# Altium PCB HammerHeadBreakout.PcbDoc
Units mil, origin at the board's own origin, x right, y up, seen from the top; angles counter-clockwise.
Board outline 4000 x 1500 mil, 2 copper layers (Top Layer, Bottom Layer); 23 components, 20 nets, 85 pads, 24 vias.
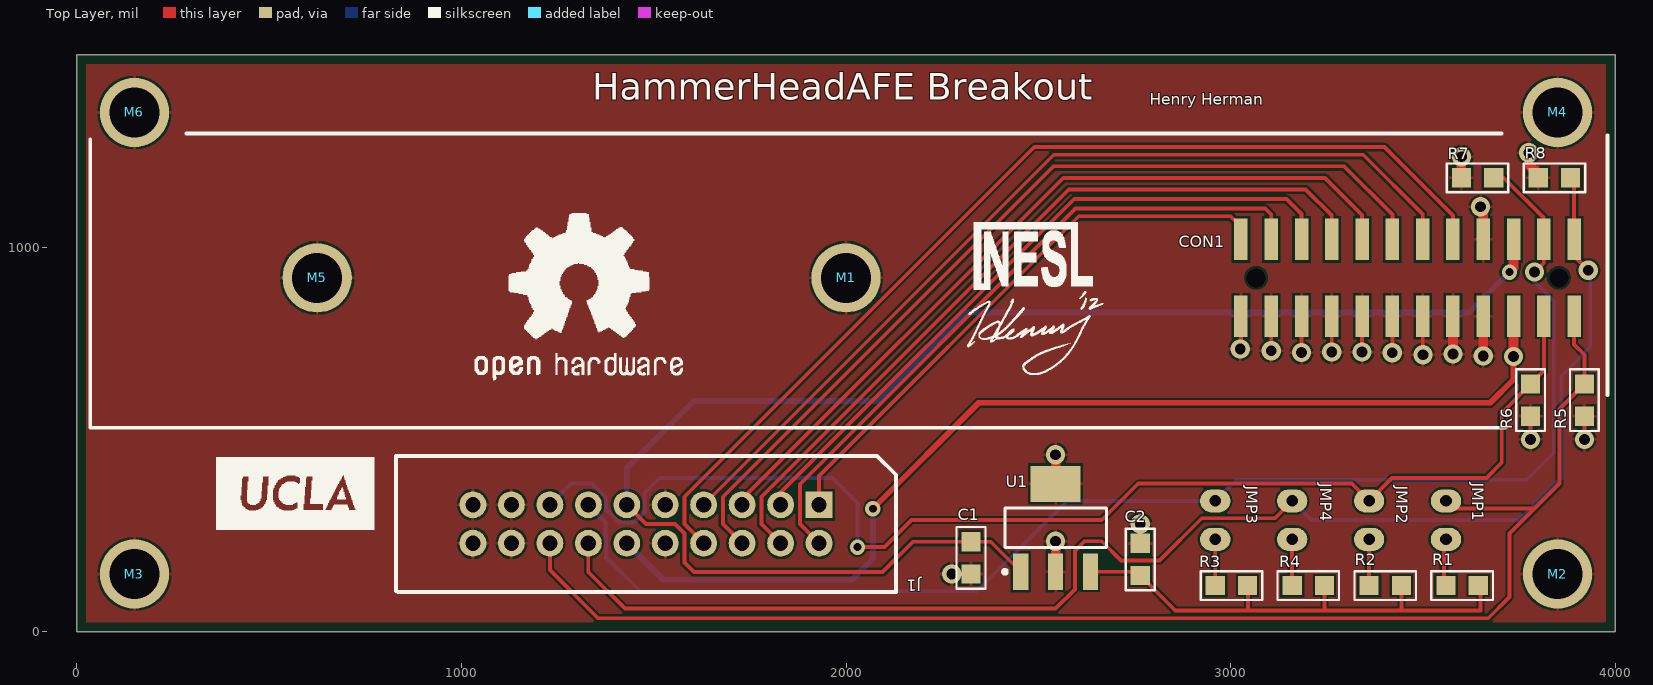
[diagram p0: Top Layer view]
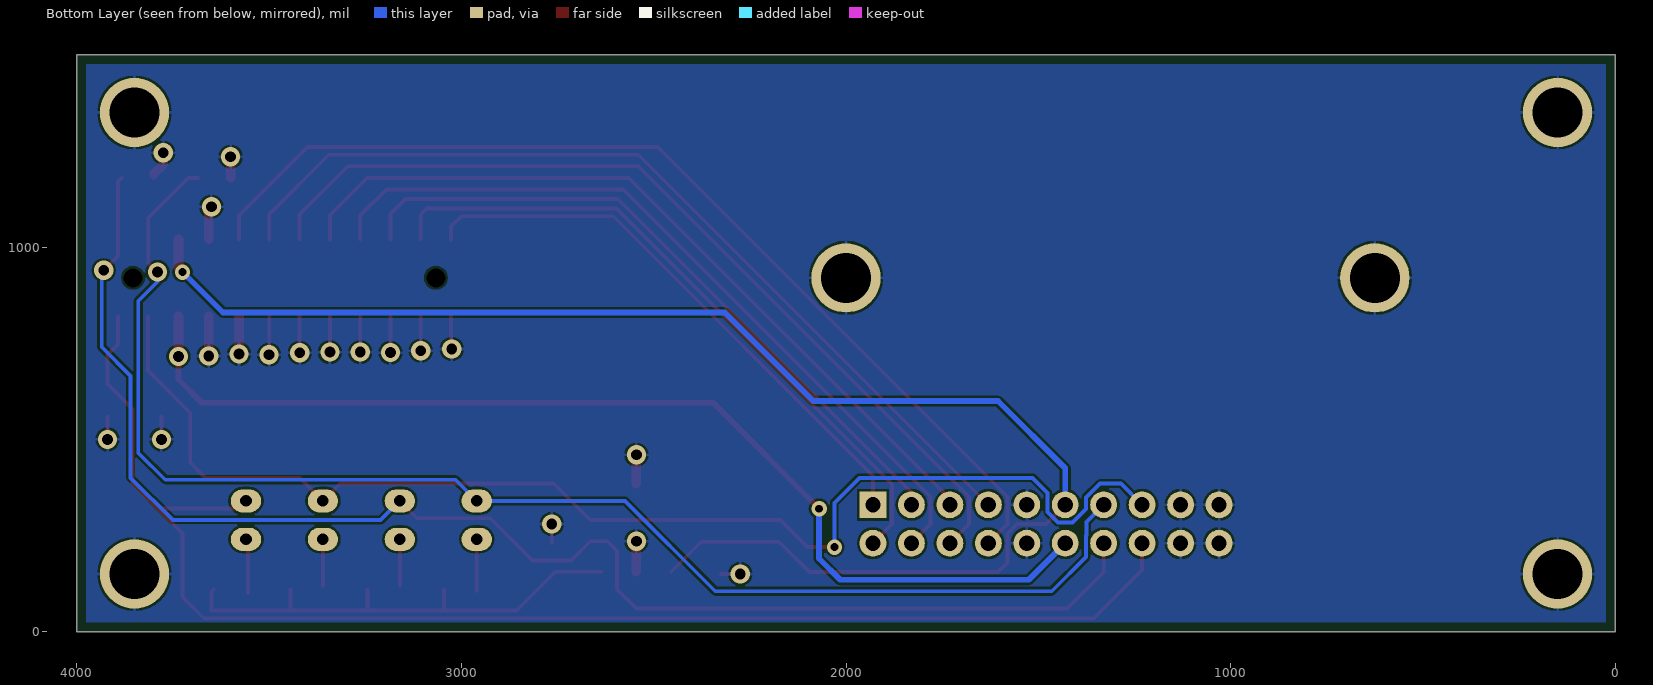
[diagram p1: Bottom Layer view, seen from below]

## Layer stack, top to bottom
Top Layer: signal copper 1.4
Dielectric: dielectric 12.6, FR-4, Dk 4.8
Bottom Layer: signal copper 1.4

## Board outline
0,0 0,1500 4000,1500 4000,0

## Design rules (kind name [scope] priority, off if disabled: settings)
Clearance "Clearance~Sunstone Circuits" [All] p1: gap=6 // Sunstone Circuits Minimum Clearance Rule (Double Sided)
HoleSize "HoleSize~Sunstone Circuits" [All] p1: absolutevalues=TRUE maxlimit=251 minlimit=16 maxpercent=80.000 minpercent=20.000 // SSC Hole Size Rule For Single Sided & Double Sided Designs.
HoleSize Testpoint [All] p2: absolutevalues=TRUE maxlimit=100 minlimit=1 maxpercent=80.000 minpercent=20.000
HoleSize TestPointUsage [All] p3: absolutevalues=TRUE maxlimit=100 minlimit=1 maxpercent=80.000 minpercent=20.000
MinimumAnnularRing "MinimumAnnularRing~Sunstone Circuits" [All] p1: minimumring=7 // Sunstone Circuits Minimum Annular Ring (Double Sided)
PlaneClearance "PlaneClearance~Sunstone Circuits" [All] p1: clearance=12 // Sunstone Circuits Power Plane Clearance Rule (Double Sided)
PlaneConnect "PlaneConnect~Sunstone Circuits" [All] p1: planeconnectstyle=Relief reliefexpansion=10 reliefentries=4 reliefconductorwidth=8 reliefairgap=10 // Sunstone Circuits Power Plane Connect Rule (Double Sided)
PolygonConnect "PolygonConnect~Sunstone Circuits" [All] p1: connectstyle=Relief reliefconductorwidth=8 reliefentries=4 polygonreliefangle="90 Angle" // Sunstone Circuits Polygon Connect Style (Double Sided)
RoutingVias "RoutingVias~Sunstone Circuits" [All] p1: holewidth=16 width=30 viastyle="Through Hole" minholewidth=16 minwidth=30 maxholewidth=20 maxwidth=40 // Sunstone Circuits Routing Vias Rule (Double Sided)
ShortCircuit "ShortCircuit~Sunstone Circuits" [All] p1: allowed=FALSE // Sunstone Circuits Short Circuit Rule~Do Not Allow (Double Sided)
SilkscreenOverComponentPads [All] p1: minsilkscreentomaskgap=10
SolderMaskExpansion "SolderMaskExpansion~Sunstone Circuits" [All] p1: expansion=3 // Sunstone Circuits Solder Mask Expansion Rule (Double Sided)
ViasUnderSMD "ViasUnderSMD~Sunstone Circuits" [All] p1: allowed=FALSE // Sunstone Circuits Vias Under SMD~Do Not Allow (Double Sided)
Width "Width~Sunstone Circuits" [All] p1: maxlimit=100 minlimit=6 preferedwidth=10 // Sunstone Circuits Minimum Width Rule (Double Sided)
23 further rules are at their usual default settings.

## Components (designator, comment, footprint, x,y, rotation, side; value= is the part's Value field where it differs from the comment)
C1 "CAP" SM/C_0805 2325,150 r90 top
C2 "CAP" SM/C_0805 2765,230 r270 top
CON1 "24pinHeader" CONN-RECEPT-24PIN 3460,920 r0 top
J1 "20 Pin Male header pins" M10x2-Shrouded 1480,280 r180 top
JMP1 "JMPR-2PIN-THRU" M02 3560,340 r270 top
JMP2 "JMPR-2PIN-THRU" M02 3360,340 r270 top
JMP3 "JMPR-2PIN-THRU" M02 2960,340 r270 top
JMP4 "JMPR-2PIN-THRU" M02 3160,340 r270 top
M1 "M3 HOLE" MOUNTING_HOLE-125mil#1 2400,900 r0 top
M2 "M3 HOLE" MOUNTING_HOLE-125mil#2 3850,150 r0 top
M3 "M3 HOLE" MOUNTING_HOLE-125mil#3 160,165 r0 top
M4 "M3 HOLE" MOUNTING_HOLE-125mil#4 3860,1350 r0 top
M5 "M3 HOLE" MOUNTING_HOLE-125mil#5 625,900 r0 top
M6 "M3 HOLE" MOUNTING_HOLE-125mil#6 140,1360 r0 top
R1 "Res" SM/R_0805 3560,120 r0 top
R2 "Res" SM/R_0805 3360,120 r0 top
R3 "Res" SM/R_0805 2960,120 r0 top
R4 "Res" SM/R_0805 3160,120 r0 top
R5 "Res" SM/R_0805 3920,560 r90 top
R6 "Res" SM/R_0805 3780,560 r90 top
R7 "Res" SM/R_0805 3600,1180 r0 top
R8 "Res" SM/R_0805 3800,1180 r0 top
U1 "LT1129-5" SOT223-3Lead-STPackage-LinearTechLT1129-3.3 2545,270 r90 top

## Footprints (in the part's own frame and the unit in brackets; to place one, negate y for a bottom-side part, rotate by r counter-clockwise, add the part's x,y. Pads: shape width x height; smd on the part's side, far side on the other; paste and mask are expansions set on the pad)
CONN-RECEPT-24PIN [mm] "2MM-SMD-DUAL-24POS-PART#:S6010-12-ND"
  rect 0x0 hole 1.25: 0(-10,0) 0(10,0)
  rect 0.89x2.75 smd: 1(-11,-2.54) 2(-11,2.54) 2(-11,2.54) 3(-9,-2.54) 4(-9,2.54) 5(-7,-2.54) 6(-7,2.54) 7(-5,-2.54) 8(-5,2.54) 9(-3,-2.54) 10(-3,2.54) 11(-1,-2.54) 12(-1,2.54) 13(1,-2.54) 14(1,2.54) 15(3,-2.54) 16(3,2.54) 17(5,-2.54) 18(5,2.54) 19(7,-2.54) 20(7,2.54) 21(9,-2.54) 22(9,2.54) 23(11,-2.54) 24(11,2.54)
M02 [mil]
  oval 60x78.74 hole 30: 1(0,0) 2(100,0)
M10x2-Shrouded [mil]
  rect 70x70 hole 39.37: 1(-450,-50)
  round 70 hole 39.37: 2(-450,50) 3(-350,-50) 4(-350,50) 5(-250,-50) 6(-250,50) 7(-150,-50) 8(-150,50) 9(-50,-50) 10(-50,50) 11(50,-50) 12(50,50) 13(150,-50) 14(150,50) 15(250,-50) 16(250,50) 17(350,-50) 18(350,50) 19(450,-50) 20(450,50)
  silkscreen extent -650,-177 650,177
MOUNTING_HOLE-125mil#1 [mil]
  round 180 hole 130: 0(-400,20)
MOUNTING_HOLE-125mil#2 [mil]
  round 180 hole 130: 0(0,0)
MOUNTING_HOLE-125mil#3 [mil]
  round 180 hole 130: 0(-10,-15)
MOUNTING_HOLE-125mil#4 [mil]
  round 180 hole 130: 0(-10,0)
MOUNTING_HOLE-125mil#5 [mil]
  round 180 hole 130: 0(0,20)
MOUNTING_HOLE-125mil#6 [mil]
  round 180 hole 130: 0(10,-10)
SM/C_0805 [mil]
  rect 50x50 smd: 1(0,0) 2(84,0)
  silkscreen extent -38,-38 122,38
SM/R_0805 [mil]
  rect 50x50 smd: 1(0,0) 2(84,0)
  silkscreen extent -38,-38 122,38
SOT223-3Lead-STPackage-LinearTechLT1129-3.3 [mm] "LT1129-3.3"
  rect 2.4x1 smd: 1(-2.9,2.3) 2(-2.9,0) 3(-2.9,-2.3)
  rect 2.4x3.3 smd: 4(2.9,0)
  silkscreen extent -3.02,-3.35 1.3,3.47, body extent -1.85,-3.35 1.85,3.35, height 1.8

## Part data
J1: library part M10x2-HeaderPinsConnector, "Standard 20 Pin Ribbon Cable Connector"
M1 M2 M3 M4 M5 M6: library part MountingHole
R1 R2 R3 R4 R5 R6 R7 R8: "Resistor"

## Via types
v1: diameter 50, hole 28, Top Layer to Bottom Layer, 21 vias
v2: diameter 40, hole 20, Top Layer to Bottom Layer, 3 vias

## Nets (pads, with @x,y where several pads share a name; then routed paths per layer and width w, separated by ;. In a path a pad name is that pad's centre, name@x,y a point inside that pad or via, vN(x,y) a via of type N, cw(c..) or ccw(c..) an arc to the next point about the centre after c; other vN are vias at no path point)
+10V: C1.2 CON1.20 J1.11 U1.1 | length 3896.6
  Top Layer w10: J1.11 1480,280 1555,280 1580,255 1580,180 1605,155 2095,155 2174,234 C1.2 2376.28,234 U1.1
  Top Layer w15: v2(3725,935) v2@3735.59,945.59
  Top Layer w25: v2@3735.59,945.59 CON1.20
  Bottom Layer w15: J1.11 1430,425 1605,600 2085,600 2315,830 3620,830 v2(3725,935)
-10V: CON1.19 J1.12 | length 2801.1
  Top Layer w15: v2(2070,320) 2345,595 3675,595 3735.59,655.59 v1(3735.59,715.59)
  Top Layer w25: v1(3735.59,715.59) CON1.19
  Bottom Layer w15: J1.12 1525,135 2015,135 2070,190 v2(2070,320)
A0: CON1.22 J1.13 JMP3.1 R7.2 | length 3620
  Top Layer w10: R7.2 3710,1180 3814.33,1075.67 CON1.22 3814.33,959.33 v1(3790,935)
  Bottom Layer w10: J1.13 1375,285 1375,251.05 1376,250.05 1376,194 1465,105 2340,105 2575,340 JMP3.1 3015,395 3770,395 3840,465 3840,860 3790,910 v1(3790,935)
A1: CON1.24 J1.14 JMP4.1 R8.2 | length 3768.8
  Top Layer w10: J1.14 1330,155 1425,60 2545,60 2595,110 2595,210 2620,235 2665,235 2715,185 2815,185 2925,295 3115,295 JMP4.1 ; R8.2 3893.07,1170.93 CON1.24 3893.07,976.93 v1(3930,940)
  Bottom Layer w10: JMP4.1 3210,290 3750,290 3860,400 3860,665 3935,740 3935,945 v1(3930,940)
CS: CON1.23 J1.16 JMP1.1 R5.2 | length 3691.5
  Top Layer w10: J1.16 1230,160 1355,35 3670,35 3725,90 3725,255 3790,320 ; JMP1.1@3560,320 3790,320 ; CON1.23 3893.07,746.93 3920,720 R5.2 3855,579 3855,385 3790,320
GND: C1.1 C2.1 CON1.1 CON1.3 CON1.5 CON1.7 CON1.9 CON1.11 CON1.13 CON1.15 CON1.17 CON1.18 J1.9 J1.10 J1.17 J1.18 J1.19 J1.20 M1.0 M2.0 M3.0 M4.0 M5.0 M6.0 R5.1 R6.1 R7.1 R8.1 U1.2 U1.4 | length 1445.8
  Top Layer w10: v1(2275,150) C1.1 ; C2.1 v1(2765,280) ; v1(3025,735) 3026.93,736.93 CON1.1 ; v1(3105.67,730.67) CON1.3 ; v1(3184.41,725.59) CON1.5 ; v1(3263.15,726.85) CON1.7 ; v1(3341.89,726.89) CON1.9 ; v1(3420,725) 3420.63,725.63 CON1.11 ; CON1.13 3499.37,720.63 v1(3500,720) ; v1(3650,1105) v1@3656.85,1098.15 ; v1(3780,500) R6.1 ; R8.1 R8.1@3800,1190 ; v1(3920,500) R5.1
  Top Layer w25: U1.2 v1(2545,235) ; U1.4 v1(2545,460) ; v1(3578.11,721.89) CON1.15 ; R7.1 v1(3600,1235) ; v1(3656.85,716.85) CON1.17 ; CON1.18 v1@3656.85,1098.15 ; v1(3775,1245) 3775,1215 R8.1@3800,1190
NetJMP1_2: JMP1.2 R1.1 | length 120
  Top Layer w10: R1.1@3555,100 JMP1.2@3555,220
NetJMP2_2: JMP2.2 R2.1 | length 120
  Top Layer w10: R2.1 JMP2.2
NetJMP3_2: JMP3.2 R3.1 | length 120
  Top Layer w10: R3.1@2960,105 JMP3.2@2960,225
NetJMP4_2: JMP4.2 R4.1 | length 120
  Top Layer w10: R4.1 JMP4.2
VCC: C2.2 R1.2 R2.2 R3.2 R4.2 U1.3 | length 1279.1
  Top Layer w10: U1.3 2755.17,155.83 C2.2 2856,55 3650,55 3650,104 R1.2@3644,110 ; R3.2@3044,110 3045,109 3045,55 ; 3244,55 R4.2@3244,110 ; 3444,55 R2.2@3444,110
VIN1: CON1.2 J1.1 | length 1495.7
  Top Layer w10: J1.1 1930,405 2605,1080 3000,1080 3026.93,1053.07 CON1.2@3026.93,1020
VIN2: CON1.4 J1.2 | length 1767.4
  Top Layer w10: J1.2 1880,280 1880,383.28 2596.72,1100 3090,1100 3105.67,1084.33 CON1.4
VIN3: CON1.6 J1.3 | length 1784.1
  Top Layer w10: J1.3 1830,361.57 2593.43,1125 3145,1125 3184.41,1085.59 CON1.6
VIN4: CON1.8 J1.4 | length 2045.7
  Top Layer w10: J1.4 1780,280 1780,350.71 2579.29,1150 3195,1150 3263.15,1081.85 CON1.8
VIN5: CON1.10 J1.5 | length 2076
  Top Layer w10: J1.5 1730,345 2565,1180 3245,1180 3341.89,1083.11 CON1.10
VIN6: CON1.12 J1.6 | length 2354.4
  Top Layer w10: J1.6 1680,280 1680,350.71 2539.29,1210 3295,1210 3420.63,1084.37 CON1.12
VIN7: CON1.14 J1.7 | length 2375.9
  Top Layer w10: J1.7 2540,1240 3345,1240 3499.37,1085.63 CON1.14
VIN8: CON1.16 J1.8 | length 2651.8
  Top Layer w10: J1.8 1580,280 1580,350.71 2489.29,1260 3400,1260 3578.11,1081.89 CON1.16
WR: CON1.21 J1.15 JMP2.1 R6.2 | length 3330.8
  Top Layer w10: v2(2030,220) 2100,220 2170,290 2665,290 2760,385 3315,385 JMP2.1 3420,400 3665,400 3705,440 3705,569 R6.2 3815,679 3815,819.33 CON1.21
  Bottom Layer w10: J1.15 1285,385 1340.05,385 1376,349.05 1376,318.95 1410.95,284 1449.05,284 1476,310.95 1476,361 1515,400 1965,400 2030,335 v2(2030,220)
pads on no net: CON1.0

## Polygon pours and split planes (outlines as drawn)
GND on Bottom Layer "GND@BOT" (solid, remove dead copper): 25,1475 3975,1475 3975,25 25,25 25,1475
GND on Top Layer "GND@TOP" (solid): 25,1475 25,25 3975,25 3975,1475 25,1475

## Silkscreen, mask and mechanical layers (free items; w line width, h text height)
Top Overlay:
  drawing of 4026 lines, arcs and shapes, not listed
  text "HammerHeadAFE Breakout" at 1340,1360 h118.11
  text "Henry Herman" at 2790,1360 h50
Mechanical 2:
  the board outline again, w6

## Dimensions
0,1500 to 4000,1500 on Mechanical 4
0,1500 to 0,0 on Mechanical 4